# Altium PCB GPS.PcbDoc
Units mil, origin at the board's own origin, x right, y up, seen from the top; angles counter-clockwise.
Board outline 1900 x 1265 mil, 4 copper layers (Top Layer, Layer 1, Layer 2, Bottom Layer), stack 61.758 mil thick; 22 components, 22 nets, 76 pads, 301 vias.
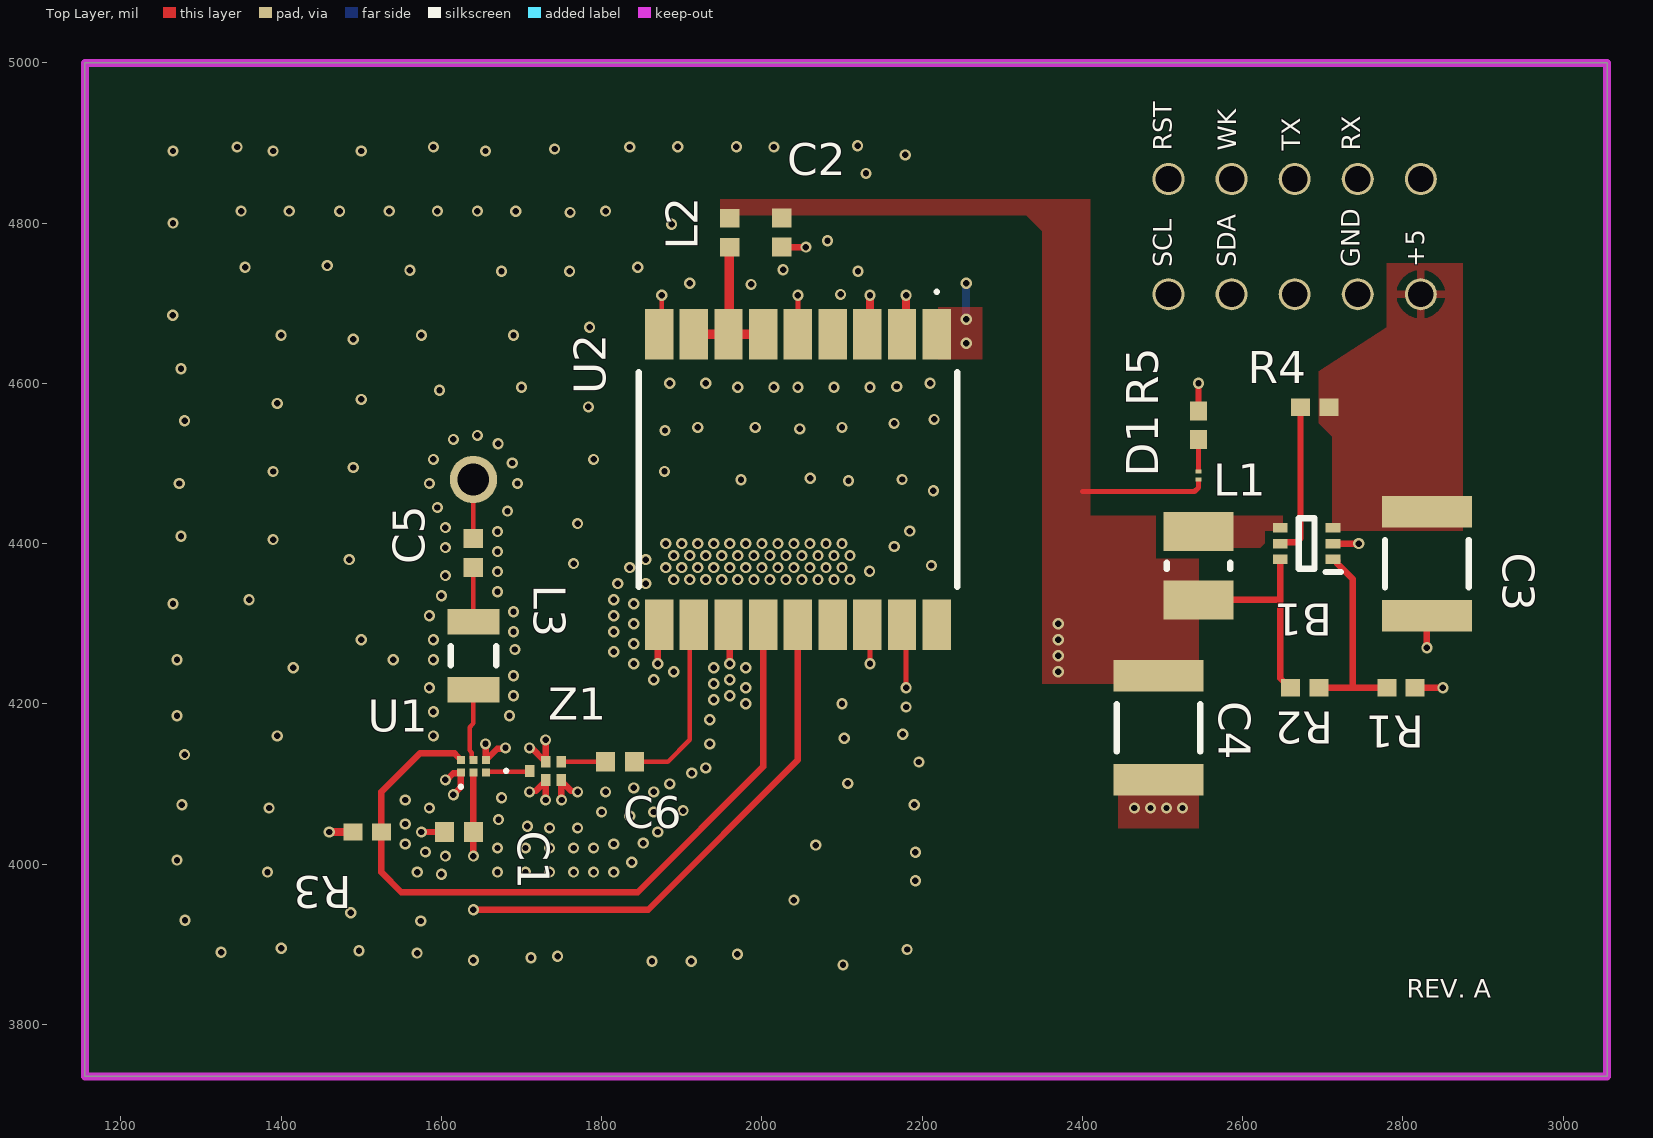
[diagram p0: Top Layer view]
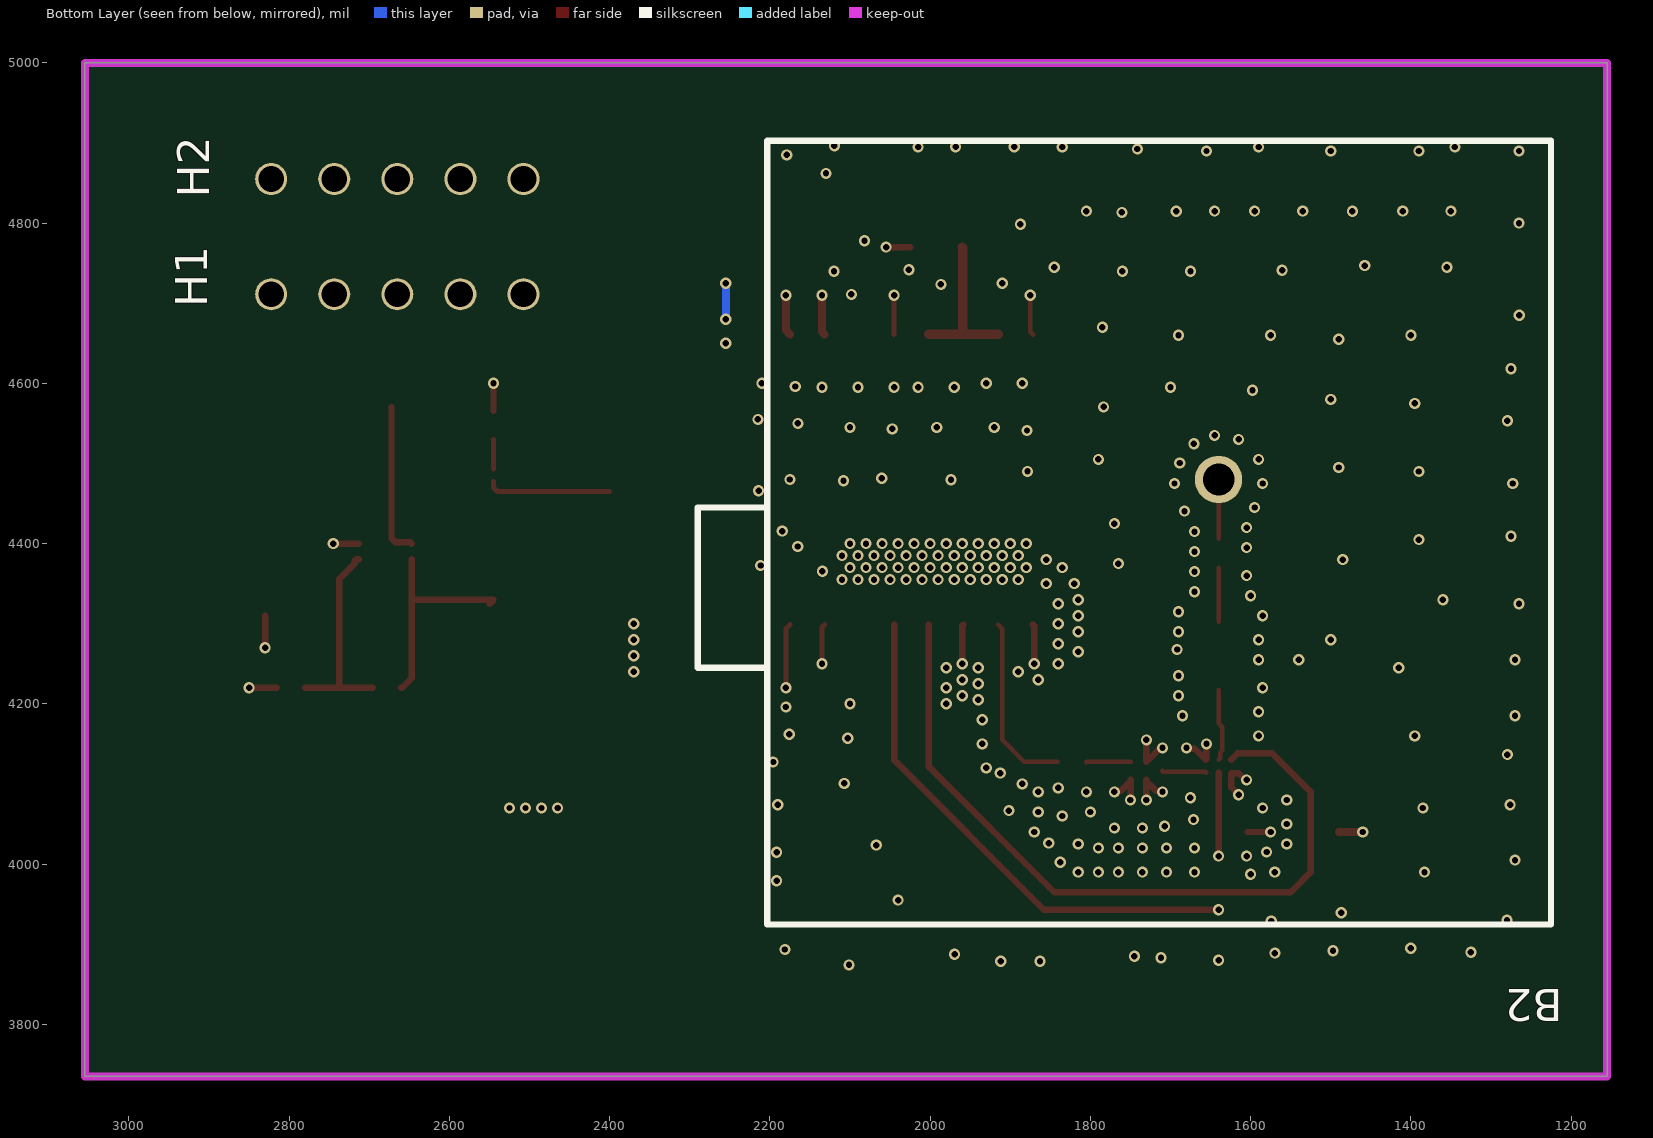
[diagram p1: Bottom Layer view, seen from below]
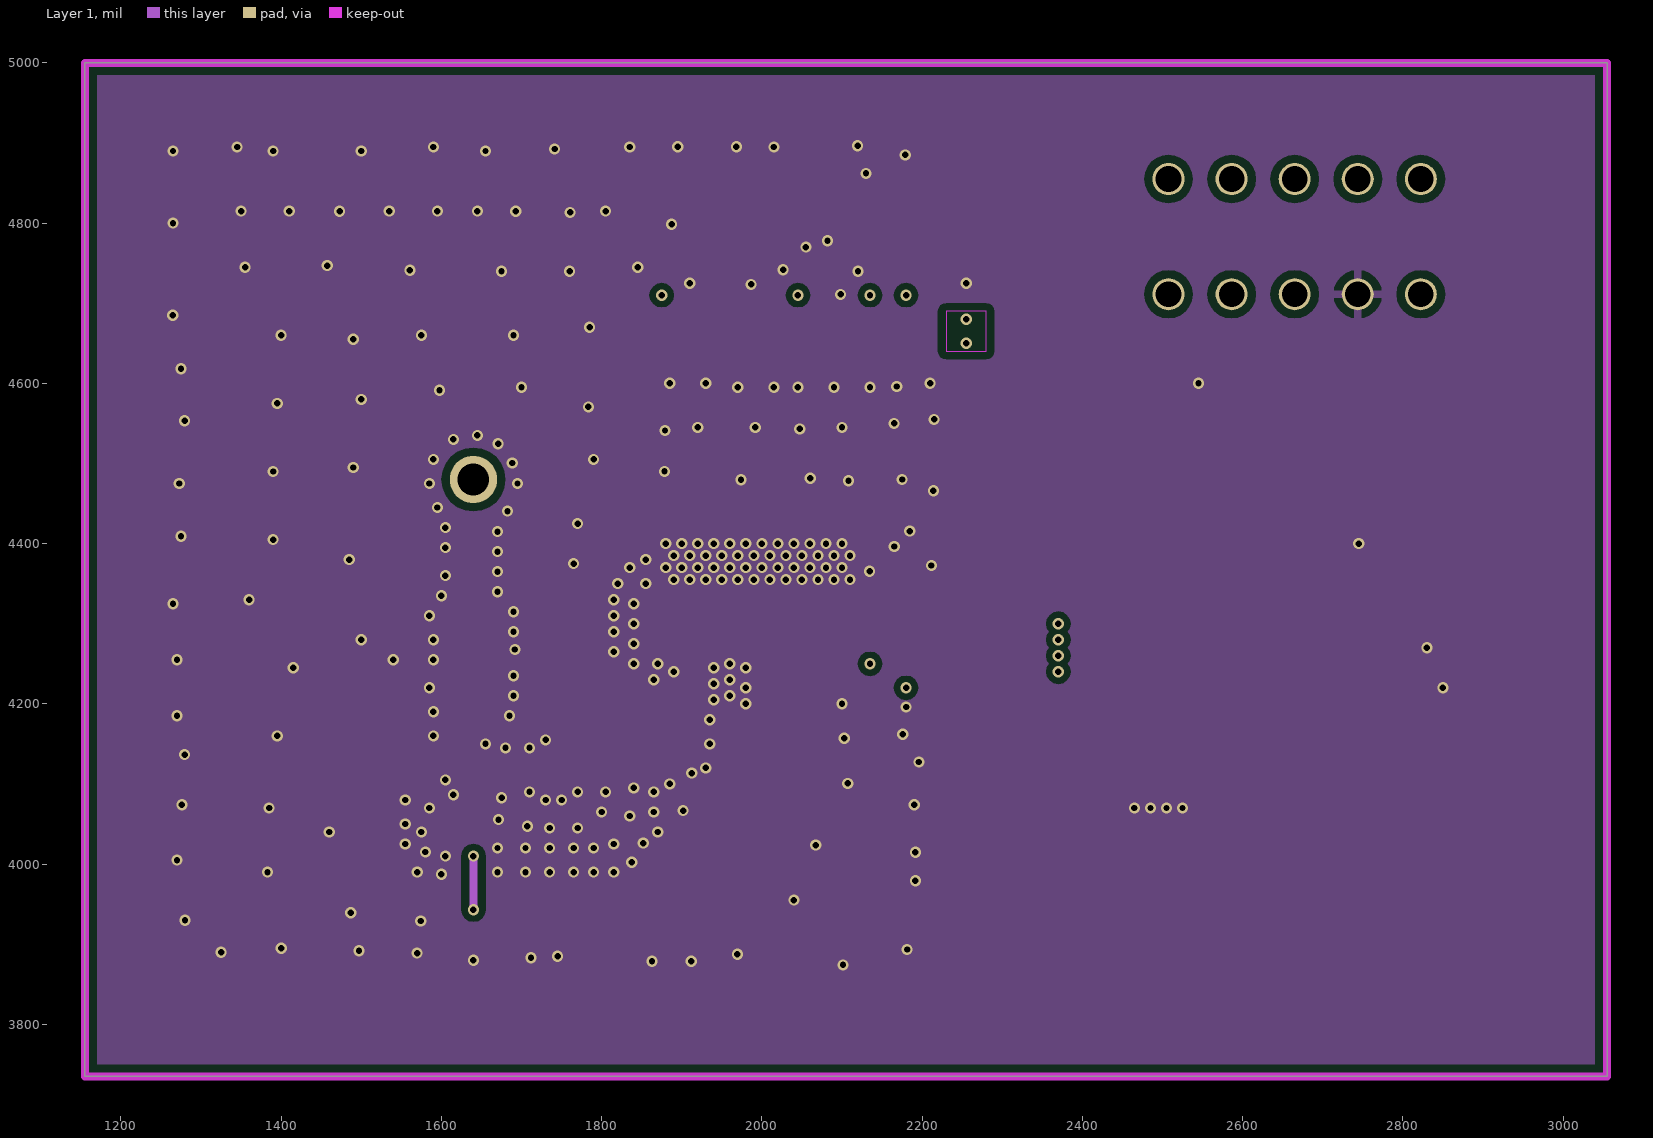
[diagram p2: Layer 1]
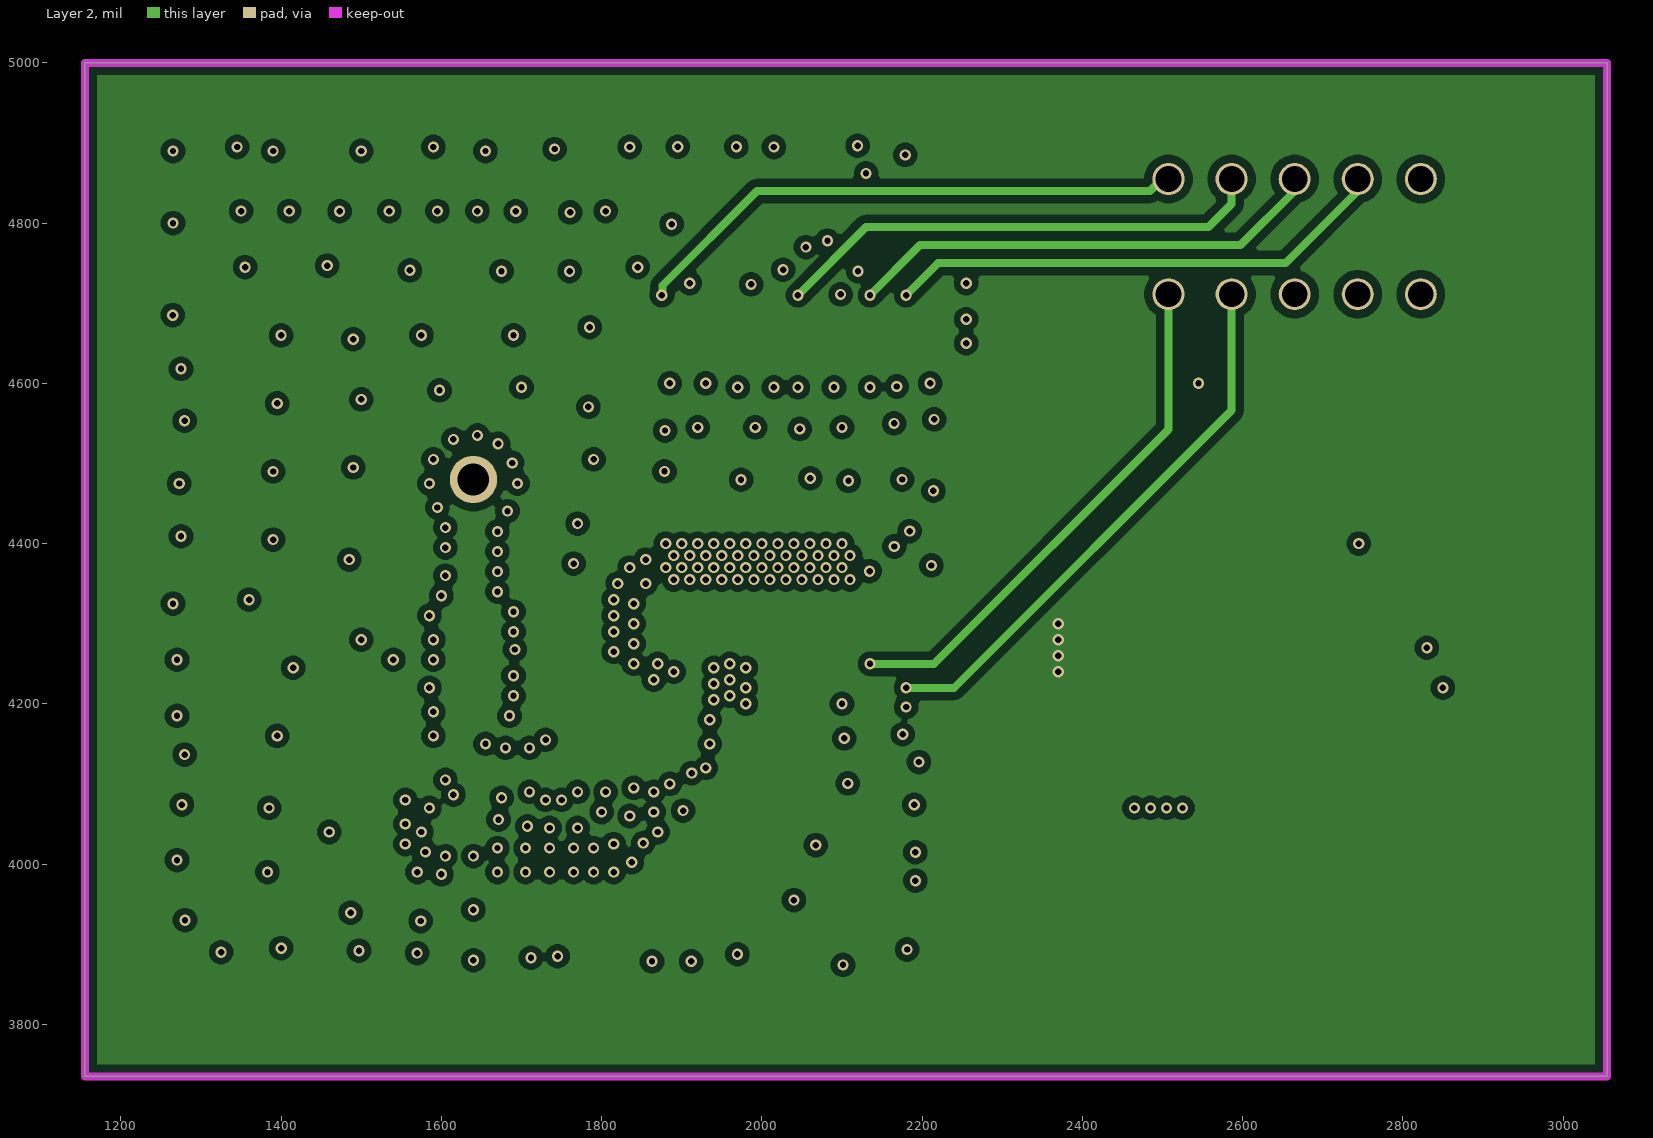
[diagram p3: Layer 2]
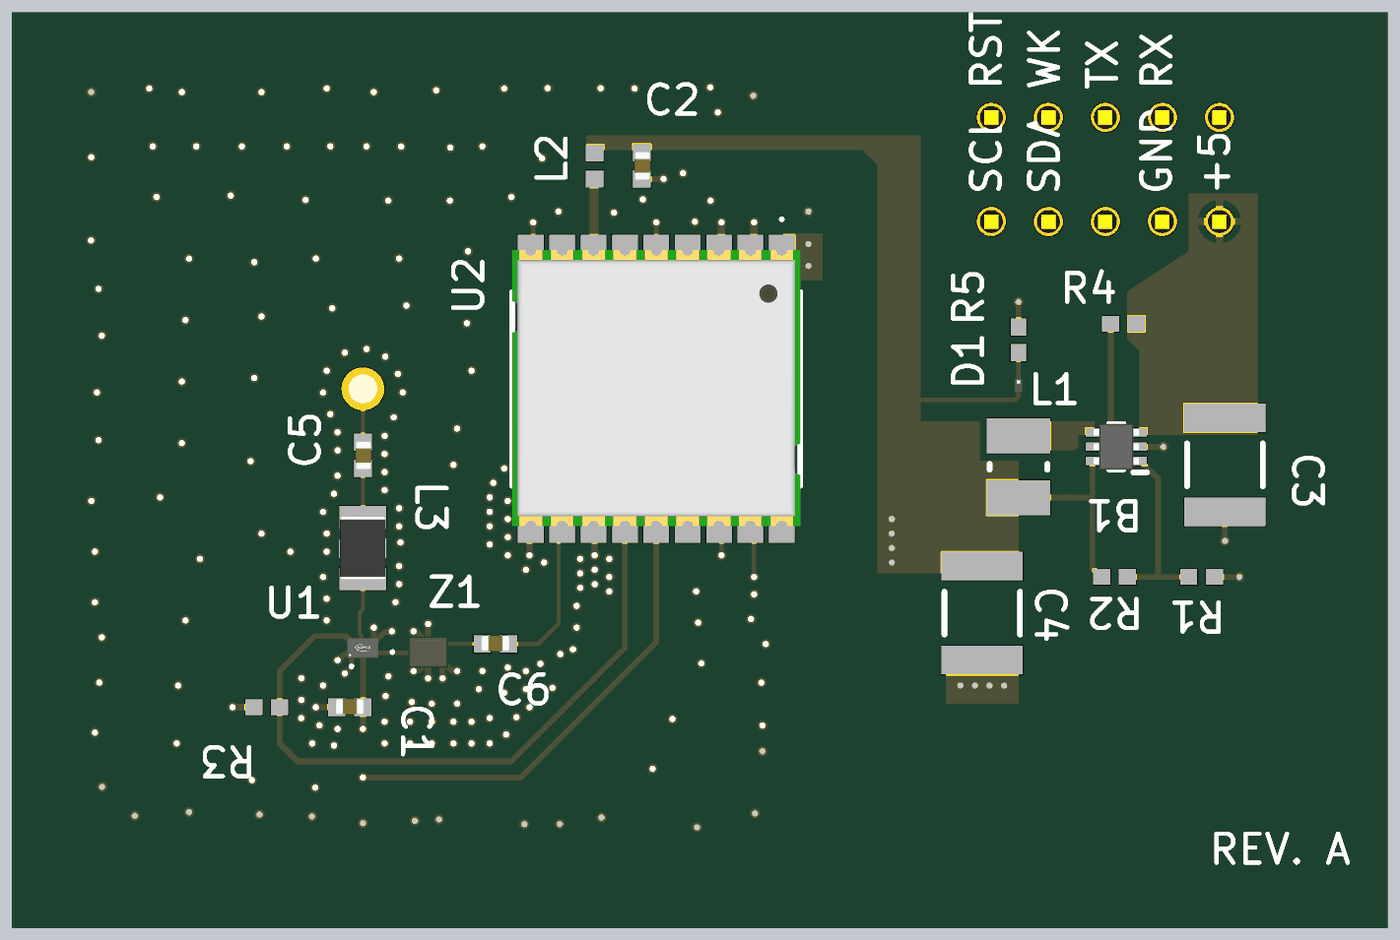
[diagram p4: 3D render of the assembled board from above, using the file's embedded part models]

## Layer stack, top to bottom
Top Solder: solder mask 0.4, Solder Resist, Dk 3.5
Top Layer: signal copper 1.38
Dielectric 2: prepreg 3.91, PP-017, Dk 4.3
Layer 1: signal copper 0.689
Dielectric 1: core 49.8, FR-4, Dk 4.8
Layer 2: signal copper 0.689
Dielectric 3: prepreg 3.91, PP-017, Dk 4.3
Bottom Layer: signal copper 1.38
Bottom Solder: solder mask 0.4, Solder Resist, Dk 3.5

## Board outline
1155,3735 1155,5000 3055,5000 3055,3735

## Design rules (kind name [scope] priority, off if disabled: settings)
Clearance [All] p1: gap=10 ignorepadtopadclearanceinfootprint=TRUE except(4: Arc-Arc Arc-Track Track-Track; 5.9: SMDPad-SMDPad; 6: Arc-SMDPad Track-SMDPad; 8: Arc-Hole Track-Hole Via-Fill Via-Poly Via-Region; 18: THPad-THPad)
HoleToHoleClearance [All] p1: gap=8 allowstackedmicrovias=TRUE
MinimumSolderMaskSliver [All] p1: minsoldermaskwidth=4
PolygonConnect [All] p1: connectstyle=Direct reliefconductorwidth=10 reliefentries=4 polygonreliefangle="90 Angle" airgapwidth=10
RoutingVias [All] p1: holewidth=8 width=14 viastyle="Through Hole" minholewidth=8 minwidth=14 maxholewidth=8 maxwidth=14
SilkToSolderMaskClearance [IsPad] p1: minsilkscreentomaskgap=5.91 clearancetoexposedcopper=TRUE
SolderMaskExpansion [All] p1: expansion=1.5 istentingtop=FALSE
SupplyNets "Schematic Supply Nets_1" [InNet('GND')] p1: voltage=0.000
SupplyNets "Schematic Supply Nets_3" [InNet('+5')] p2: voltage=0.000
SupplyNets "Schematic Supply Nets_2" [InNet('VCC_RF')] p3: voltage=0.000
SupplyNets "Schematic Supply Nets" [InNet('3V3')] p4: voltage=0.000
Width [All] p1: maxlimit=200 minlimit=4 preferedwidth=10 midlayer1_minwidth=10 midlayer1_maxwidth=10 midlayer2_minwidth=10 midlayer2_maxwidth=10 minimp=50.000000 maximp=50.000000 favimp=50.000000
27 further rules are at their usual default settings.

## Components (designator, comment, footprint, x,y, rotation, side; value= is the part's Value field where it differs from the comment)
B1 "MP2141NGTF-Z" MP2141NGTF-Z 2680,4400 r180 top
B2 "ANT2525B00DT1516S" ANT2525B00DT1516S 1640,4480 r0 bottom
C1 "1nF" CAP_1005M(0402) 1621.89,4040 r180 top
C2 "10nF" CAP_1005M(0402) 2025,4788.11 r90 top
C3 "22uF" CAP_3225M(1210) 2830,4374.96 r270 top
C4 "22uF" CAP_3225M(1210) 2495,4170.04 r270 top
C5 "120pF" CAP_1005M(0402) 1640,4388.11 r90 top
C6 "120pF" CAP_1005M(0402) 1822.82,4127.46 r180 top
D1 "Green" APG015CGKKC-TT 2545,4490 r270 top
H1 "1x5 Header Pin" M22-2510505 2507.52,4711.2 r0 bottom
H2 "1x5 Header Pin" M22-2510505 2507.52,4855 r0 bottom
L1 "1uH" IND_1008(2520m) 2545,4372.28 r270 top
L2 "27nH" IND_0402(1005m) 1960,4787.91 r90 top
L3 "5.6 nH" IND_(0805) 1640,4260 r270 top
R1 "44.2k" RES_YAG_0402 2797.72,4220 r180 top
R2 "200k" RES_YAG_0402 2677.72,4220 r180 top
R3 "10k" RES_YAG_0402 1507.28,4040 r180 top
R4 "100k" RES_YAG_0402 2690,4570 r180 top
R5 "120" RES_YAG_0402 2545,4547.72 r270 top
U1 "BGA725L6" BGA725L6E6327FTSA1 1640,4114.25 r90 top
U2 "TESEO-LIV3R" TESEOLIV3R 2045,4480 r0 top
Z1 "B4327" B39162B4327P810 1730,4116.3 r0 top

## Footprints (in the part's own frame and the unit in brackets; to place one, negate y for a bottom-side part, rotate by r counter-clockwise, add the part's x,y. Pads: shape width x height; smd on the part's side, far side on the other; paste and mask are expansions set on the pad)
ANT2525B00DT1516S [mm] "Antennas 20MHz 1575-1606MHz GPS & GLONASS Ceramic PAtch Antenna"
  round 1.5 hole 1: 1(0,0)
  silkscreen extent -10.54,-10.74 16.51,14.11, body extent -10.52,-10.77 16.38,14.08, height 4.84
APG015CGKKC-TT [mm] "Single Color LEDs 0.45X0.25MM GRN SMD LED"
  rect 0.13x0.2 smd mask+0: 1(0,0) 2(0.257,0)
  body extent -0.1,-0.13 0.35,0.12, height 0.21
B39162B4327P810 [mm]
  rect 0.3x0.375 smd: 1(-0.5,0) 2(0,-0.287) 3(0.5,-0.287) 4(0.5,0.287) 5(0,0.287)
  silkscreen extent -1.3,-0.05 -1.2,0.05, body extent -0.7,-0.55 0.7,0.55, height 0.4
BGA725L6E6327FTSA1 [mm]
  rect 0.25x0.25 smd mask+0: 1(0,0.4) 2(0,0) 3(0,-0.4) 4(0.4,-0.4) 5(0.4,0) 6(0.4,0.4)
  silkscreen extent -0.5,0.35 -0.4,0.45, body extent -0.15,-0.55 0.55,0.55, height 0.4
CAP_1005M(0402) [mm] "Chip Capacitor, 2-Leads, Body 1.00x0.50mm, IPC Medium Density"
  rect 0.6x0.62 smd: 1(-0.46,0) 2(0.46,0)
  body extent -0.5,-0.3 0.5,0.25, height 0.48
CAP_3225M(1210) [mm] "Ceramic Chip Capacitor, 2-LEads, Body 3.2x25x2.5mm, IPC Medium Density"
  rect 1x2.85 smd: 1(-1.65,0) 2(1.65,0)
  silkscreen extent -0.75,-1.32 0.75,1.33, body extent -1.78,-1.42 1.78,1.43, height 2.85
IND_0402(1005m) [mm] "0.25x0.25x0.5mm chip inductor"
  rect 0.59x0.62 smd: 1(-0.455,0) 2(0.455,0)
  body extent -0.53,-0.28 0.53,0.27, height 0.55
IND_1008(2520m) [mm] "Shielded"
  rect 1.23x2.22 smd: 1(-1.085,0) 2(1.085,0)
  silkscreen extent -0.1,-1.01 0.1,1.01, body extent -1.35,-1.1 1.35,1.1, height 1.2
IND_(0805) [mm] "Chip Inductor, 2-Leads, Body 2.11x1.50mm, IPC Medium Density"
  rect 0.8x1.64 smd: 1(-1.075,0) 2(1.075,0)
  silkscreen extent -0.3,-0.72 0.3,0.72, body extent -1.1,-0.8 1.1,0.8, height 1.04
M22-2510505 [mil] "Headers & Wire Housings 5 PIN SIL VERTICAL GOLD PIN HEADER, 3.5mm, 2.0mm pitch"
  round 40 hole 32: 1(0,0) 2(78.74,0) 3(157.48,0) 4(236.22,0) 5(314.96,0)
  body extent -39,-39 354,39, height 197
MP2141NGTF-Z [mm]
  rect 0.475x0.3 smd: 1(-0.838,0.5) 2(-0.838,0) 3(-0.838,-0.5) 4(0.838,-0.5) 5(0.838,0) 6(0.838,0.5)
  silkscreen extent -1.07,-0.8 0.25,0.9, body extent -0.8,-0.8 0.8,0.8, height 0.6
RES_YAG_0402 [mm] "Yageo RT0402, 1.00x0.5x0.3"
  rect 0.6x0.55 smd: 1(-0.45,0) 2(0.45,0)
  body extent -0.55,-0.27 0.55,0.28, height 0.35
TESEOLIV3R [mm]
  rect 0.9x1.6 smd: 1(4.4,4.6) 2(3.3,4.6) 3(2.2,4.6) 4(1.1,4.6) 5(0,4.6) 6(-1.1,4.6) 7(-2.2,4.6) 8(-3.3,4.6) 9(-4.4,4.6) 10(-4.4,-4.6) 11(-3.3,-4.6) 12(-2.2,-4.6) 13(-1.1,-4.6) 14(0,-4.6) 15(1.1,-4.6) 16(2.2,-4.6) 17(3.3,-4.6) 18(4.4,-4.6)
  silkscreen extent -5.05,-3.4 5.05,6, body extent -5.05,-4.83 5.05,4.87, height 2.3

## Part data
B1: "IC REG 1A STEP-DOWN SYNCH 2.2MHz", Manufacturer_Name="Monolithic Power Systems (MPS)", Mouser Part Number=946-MP2141NGTF-Z, Datasheet Link=https://componentsearchengine.com/Datasheets/1/MP2141NGTF-Z.pdf, Geometry.Height=0.6mm, Manufacturer_Part_Number=MP2141NGTF-Z, Mouser Price/Stock=https://www.mouser.com/Search/Refine.aspx?Keyword=946-MP2141NGTF-Z, Supplier 1=Mouser, Supplier Part Number 1=946-MP2141NGTF-Z
B2: "Antennas 20MHz 1575-1606MHz GPS & GLONASS", Manufacturer_Name=PULSE, Mouser Part Number=603-ANT225B00DT1516S, Datasheet Link=https://productfinder.pulseelectronics.com/api/open/part-attachments/datasheet/ANT2525B00DT1516S, Geometry.Height=4.1mm, Manufacturer_Part_Number=ANT2525B00DT1516S, Mouser Price/Stock=https://www.mouser.co.uk/ProductDetail/Pulse-Electronics/ANT2525B00DT1516S?qs=oypCK0zG3250CICQYDti8w%3D%3D, Supplier 1=Mouser, Supplier Part Number 1=603-ANT225B00DT1516S
C1: library part GCM155R71H102KA37, "Chip Capacitor, 1nF +/-10%, 50V, 0402, Thickness 0.5 mm", Capacitor Type=Ceramic, Case/Package=0402, Max Operating Temperature=125°C, Min Operating Temperature=-55°C, Supplier Part Number 1=81-GCM155R71H102KA7J, Tolerance=+/-10%, Voltage Rating=50, Mounting Technology=SM, Pins=2, RoHS Compliant=Yes, Supplier 1=Mouser
C2: library part GCM155R71H103KA55D, "Chip Capacitor, 10nF +/-10%, 50V, 0402, Thickness 0.5 mm", Capacitor Type=Ceramic, Case/Package=0402, Max Operating Temperature=125°C, Min Operating Temperature=-55°C, Supplier Part Number 1=81-GCM155R71H103KA5D, Tolerance=+/-10%, Voltage Rating=50, Mounting Technology=SM, Pins=2, RoHS Compliant=Yes, Supplier 1=Mouser
C3 C4: library part GCM32EC71E226KE36K, "Chip Capacitor, 22uF +/-10%, 25V, 3225, Thickness 2.5 mm", Capacitor Type=Ceramic, Case/Package=3225, Max Operating Temperature=125°C, Min Operating Temperature=-55°C, Supplier Part Number 1=81-GCM32EC71E226KE6K, Tolerance=+/-10%, Voltage Rating=25, Mounting Technology=SM, Pins=2, RoHS Compliant=Yes, Supplier 1=Mouser
C5 C6: library part GCM1555C1H121JA16, "Chip Capacitor, 120pF +/-5%, 50V, 0402, Thickness 0.5 mm", Capacitor Type=Ceramic, Case/Package=0402, Max Operating Temperature=125°C, Min Operating Temperature=-55°C, Supplier Part Number 1=81-GCM1555C1H121JA6D, Tolerance=+/-5%, Voltage Rating=50, Mounting Technology=SM, Pins=2, RoHS Compliant=Yes, Supplier 1=Mouser
D1: library part APG015CGKKC-TT, "Green LED", Supplier Part Number 1=604-APG015CGKKC-TT, Supplier 1=Mouser
H1 H2: library part M22-2510505, "1x5, 3.5mm, 2 mm pitch", Supplier Part Number 1=855-M22-2510505, Supplier 1=Mouser
L1: library part 1239AS-H-1R0M=P2, "1uH, 20%, 1008(2520m), Inductor Shielded", Part Number=L08055R6CEWTR, Supplier Part Number 1=81-1239AS-H-1R0MP2, Tolerance="0.2 nH", Supplier 1=Mouser
L2: library part LQG15HS27NJ02D, "27nH, 5%, 0402(1005m), Inductor Unshielded, 350ma", Part Number=L08055R6CEWTR, Supplier Part Number 1=81-LQG15HS27NJ02D, Tolerance="0.2 nH", Supplier 1=Mouser
L3: library part L08055R6CESTR, "5.6(+/- 0.2) nH 0402 Inductor Unshielded", Part Number=L08055R6CEWTR, Supplier Part Number 1=581-L08055R6CESTR, Tolerance="0.2 nH", Supplier 1=Mouser
R1: library part RT0402FRE07200KL, "200k, 0402(1005m), 01(03m)h, 1%, 50V, -55-155 C, 1/16W", Supplier Part Number 1=603-RT0402FRE07200KL, Supplier 1=Mouser
R2: library part RT0402FRE0744K2L, "44.2k, 0402(1005m), 01(03m)h, 1%, 50V, -55-155 C, 1/16W", Supplier Part Number 1=603-RT0402FRE07200KL, Supplier 1=Mouser
R3: library part RT0402FRE0710KL, "10k, 0402(1005m), 01(03m)h, 1%, 50V, -55-155 C, 1/16W", Supplier Part Number 1=603-RT0402FRE0710KL, Supplier 1=Mouser
R4: library part RT0402FRE07100KL, "100k, 0402(1005m), 01(03m)h, 1%, 50V, -55-155 C, 1/16W", Supplier Part Number 1=603-RT0402FRE07100KL, Supplier 1=Mouser
R5: library part RT0402FRE07120RL, "120, 0402(1005m), 01(03m)h, 1%, 50V, -55-155 C, 1/16W", Supplier Part Number 1=603-RT0402FRE07120RL, Supplier 1=Mouser
U1: "RF Amplifier RF SILICON MMIC 1.55 GHz to 1.615 GHz 1.5 V to 3.6 V 3.6 mA 20 dB", Supplier Part Number 1=BGA725L6E6327FTSA1, Supplier 1=Avnet, Supplier 2=Mouser, Supplier Part Number 2=726-BGA725L6E6327
U2: "GNSS / GPS Modules Teseo ROM GNSS module", Supplier Part Number 1=511-TESEO-LIV3R, Supplier 1=Mouser
Z1: library part B39162B4327P810, Supplier Part Number 1=871-B39162B4327P810, Supplier 1=Mouser

## Via types
v1: diameter 14, hole 8, Top Layer to Bottom Layer, 301 vias

## Nets (pads, with @x,y where several pads share a name; then routed paths per layer and width w, separated by ;. In a path a pad name is that pad's centre, name@x,y a point inside that pad or via, vN(x,y) a via of type N, cw(c..) or ccw(c..) an arc to the next point about the centre after c; other vN are vias at no path point)
3V3: B1.6 C2.2 C4.1 D1.2 L1.2 L2.2 R2.2 | length 430.4
  Top Layer w6: 2400,4465 2540,4465 2545,4470 2545,4477.76 D1.2@2544.95,4477.81
  Top Layer w8: L1.2@2550,4324.57 L1.2 2545.43,4330 2647.01,4330 ; B1.6 2647.01,4330 ; R2.2 2659.02,4220 2647.01,4232.01 2647.01,4330
  other v1: 2370,4240 2370,4260 2370,4280 2370,4300
+5: B1.3 C3.1 H1.5 R4.1
GND: B1.2 C1.2 C2.1 C3.2 C4.2 H1.4 R1.1 R3.2 R5.1 U1.1 U1.4 U2.1 U2.10 U2.12 Z1.2 Z1.3 Z1.5 | length 635
  Top Layer w8: v1(1575,4040) C1.2 ; v1(1605,4105) 1606.62,4105 1614.95,4113.33 1624.25,4113.33 1624.25,4095.88 v1(1615,4086.62) ; v1(1655,4150) 1655.37,4149.63 1655.37,4130.92 U1.4@1656.67,4130.92 ; U1.4 U1.4@1656.67,4130.92 ; v1(1680,4145) 1678.85,4143.85 1669.6,4143.85 U1.4@1656.67,4130.92 ; v1(1710,4090) 1711.15,4091.15 1717.62,4091.15 Z1.2@1730,4103.52 ; v1(1710,4145) 1711.15,4143.85 1713.75,4143.85 1726.62,4130.98 1728.09,4130.98 Z1.5@1730,4129.07 ; v1(1730,4080) Z1.2@1730,4103.52 ; Z1.2 Z1.2@1730,4103.52 ; Z1.5 Z1.5@1730,4129.07 ; v1(1730,4155) Z1.5@1730,4129.07 ; v1(1750,4080) 1749.84,4080.16 Z1.3@1749.84,4103.37 ; v1(1770,4090) 1768.85,4091.15 1762.06,4091.15 Z1.3@1749.84,4103.37 ; v1(1870,4250) 1870,4297.13 U2.10 ; U2.12 1960,4297.28 v1(1960,4250) ; C2.1 v1(2055,4770) ; R5.1 v1(2545,4600) ; B1.2 v1(2745,4400) ; R1.1 v1(2850,4220) ; v1(2830,4270) C3.2 ; Z1.3@1749.84,4103.37 1749.84,4104.84 Z1.3 1749.68,4103.52 Z1.3@1749.84,4103.37
  Top Layer w10: v1(1460,4040) R3.2
  Bottom Layer w10: v1(2255,4680) v1(2255,4725)
  other v1: 2101.28,3874.12 1862.88,3878.57 1911.74,3878.57 1640,3880 1711.85,3883.01 1745,3885 1969.49,3887.45 1569.7,3888.93 1325,3890 1497.14,3891.89 2181.24,3893.37 1400,3895 1574.14,3928.91 1280,3930 1486.78,3939.28 2040,3955 2191.6,3979.26 1600.05,3987.17 1382.92,3989.99 1570,3990 1670,3990 1705,3990 1735,3990 1765,3990 1790,3990 1815,3990 1837.72,4002.29 1270,4005 1605,4010 1580,4015 2191.6,4014.79 1670,4020 1705,4020 1735,4020 1765,4020 1790,4020 2067.22,4023.68 1555,4025 1815,4025 1851.88,4026.21 1870,4040 1735,4045 1770,4045 1707.41,4047.19 1555,4050 1671.29,4055.49 1835,4060 1800,4065 1865,4065 1901.66,4066.72 1385,4070 1585,4070 2465,4070 2485,4070 2505,4070 2525,4070 1276.12,4074.15 2190.12,4074.02 1555,4080 1675.19,4082.82 1805,4090 1865,4090 1840,4095 1885,4100 2107.2,4100.68 1912.4,4113.57 1930,4120 2196.04,4127.33 1279.53,4136.61 1935,4150 2102.76,4156.94 1395,4160 1590,4160 2175.7,4162 1935,4180 1270,4185 1685,4185 1590,4190 2180,4196 1980,4200 2100,4200 1940,4205 1690,4210 1960,4210 1585,4220 1980,4220 1940,4225 1865,4230 1960,4230 1690,4235 1890,4240 1415,4245 1940,4245 1980,4245 1840,4250 1270,4255 1540,4255 1590,4255 1815,4265 1691.79,4267.8 1840,4275 1500,4280 1590,4280 1690,4290 1815,4290 1840,4300 1585,4310 1815,4310 1690,4315 1265,4325 1840,4325 1360,4330 1815,4330 1600,4335 1670,4340 1820,4350 1855,4350 1890,4355 1910,4355 1930,4355 1950,4355 1970,4355 1990,4355 2010,4355 2030,4355 2050,4355 2070,4355 2090,4355 2110,4355 1605,4360 1670,4365 2134.44,4365.56 1835,4370 1880,4370 1900,4370 1920,4370 1940,4370 1960,4370 1980,4370 2000,4370 2020,4370 2040,4370 2060,4370 2080,4370 2100,4370 2211.55,4372.67 1765,4375 1485,4380 1855,4380 1890,4385 1910,4385 1930,4385 1950,4385 1970,4385 1990,4385 2010,4385 2030,4385 2050,4385 2070,4385 2090,4385 2110,4385 1670,4390 1605,4395 2165.23,4396.34 1880,4400 1900,4400 1920,4400 1940,4400 1960,4400 1980,4400 2000,4400 2020,4400 2040,4400 2060,4400 2080,4400 2100,4400 1390,4405 1274.99,4409.15 1670,4415 2184.44,4415.56 1605,4420 1770,4425 1682.52,4440.58 1595,4445 2214.13,4465.86 1272.72,4475.02 1585,4475 1695,4475 2108.13,4478.29 1974,4479.6 2175,4480 2060.37,4481.57 1390,4490 1878.46,4490.07 1490,4495 1688.37,4500.61 1590,4505 1790,4505 1670.8,4524.53 1615,4530 1645,4535 1879.12,4541.11 2047.28,4543.07 1920,4545 1991.66,4545.04 2100,4545 2165,4550 1279.53,4553.37 2215,4555 1783.55,4570.63 1395,4575 1500,4580 1597.62,4591.29 1700,4595 1970,4595 2015,4595 2045,4595 2090,4595 2135,4595 2168.33,4596.07 1885,4600 1930,4600 2210,4600 1274.99,4618.1 2255,4650 1490,4655 1399.89,4659.9 1575,4660 1690,4660 1785,4670 1264.77,4685.1 2098.27,4710.95 1986.49,4723.54 1910,4725 1675,4740 1760,4740 2120,4740 1560.73,4741.06 2026.46,4741.78 1355,4745 1845,4745 1457.44,4746.97 2081.94,4778.06 1887.28,4798.5 1265,4800 1760.67,4813.37 1350,4815 1410,4815 1472.93,4814.84 1535,4815 1595,4815 1645,4815 1692.8,4814.84 1805,4815 2130,4862 2179.01,4885.11 1265,4890 1390,4890 1500,4890 1655,4890 1741.24,4892.43 1345,4895 1590,4895 1835,4895 1894.97,4895.36 1968.18,4895.36 2015,4895 2119.44,4896.53
GPS_ANT_OFF: R3.1 U1.6 U2.13 | length 952.3
  Top Layer w8: U1.6 1616.66,4137.59 1616.66,4138.34 1573.34,4138.34 1525,4090 R3.1 1525,3990 1550,3965 1845,3965 2001.69,4121.69 U2.13
GPS_RF_IN: C6.1 U2.11 | length 226.5
  Top Layer w5.62: C6.1 1882.46,4127.46 1910,4155 1910,4293.82 U2.11
GPS_SCL: H1.1 U2.16 | length 712.7
  Top Layer w6: U2.16 2135,4295.51 v1(2135,4250)
  Layer 2 w10: v1(2135,4250) 2215,4250 2507.52,4542.52 H1.1
GPS_SDA: H1.2 U2.17 | length 775.6
  Top Layer w6: U2.17 2180,4293.82 v1(2180,4220)
  Layer 2 w10: v1(2180,4220) 2240,4220 2586.26,4566.26 H1.2
GPS_SYSRST: H2.1 U2.9 | length 749.3
  Top Layer w6: U2.9 1875,4664.33 v1(1875,4710)
  Layer 2 w10: v1(1875,4710) 1875.77,4710.77 1875.77,4721.88 1993.89,4840 2484.4,4840 2499.4,4855 H2.1
GPS_UART_RX: H2.3 U2.3 | length 634.1
  Top Layer w10: U2.3 2135,4664.49 v1(2135,4710)
  Layer 2 w10: v1(2135,4710) 2197.51,4772.51 2597.51,4772.51 H2.3@2665,4840
GPS_UART_TX: H2.4 U2.2 | length 668.6
  Top Layer w10: U2.2 2180,4666.18 v1(2180,4710)
  Layer 2 w10: v1(2180,4710) 2220,4750 2653.74,4750 H2.4@2743.74,4840
GPS_WK: H2.2 U2.5 | length 668.5
  Top Layer w6: U2.5 v1(2045,4710)
  Layer 2 w10: v1(2045,4710) 2130,4795 2557.52,4795 2586.26,4823.74 H2.2
NetB1_1: B1.1 R1.2 R2.1 | length 257.1
  Top Layer w8: R2.1 2737.72,4220 ; B1.1 2716.44,4380.31 2718.34,4378.41 2718.34,4374.96 2737.72,4355.59 2737.72,4220 ; R1.2 2737.72,4220
NetB1_4: B1.4 L1.1
NetB1_5: B1.5 R4.2 | length 191.4
  Top Layer w8: B1.5 2648.91,4401.91 2667.6,4401.91 2672.28,4406.59 R4.2
NetB2_1: B2.1 C5.2 | length 73.8
  Top Layer w5.62: C5.2 B2.1
NetC5_1: C5.1 L3.1 | length 67.7
  Top Layer w5.62: L3.1 C5.1
NetC6_2: C6.2 Z1.4 | length 55.1
  Top Layer w5.62: Z1.4 C6.2@1804.56,4127.6
  Top Layer w6: C6.2@1804.56,4127.6 C6.2
NetD1_1: D1.1 R5.2 | length 37.3
  Top Layer w6: 2545,4492.79 R5.2
NetL2_1: L2.1 U2.6 U2.7 U2.8 | length 196.2
  Top Layer w12: U2.8 U2.7 ; L2.1 1959.19,4769.19 1959.19,4661.91 U2.7 ; U2.6 U2.7
NetL3_2: L3.2 U1.5 | length 91.7
  Top Layer w5.62: U1.5 1637.98,4132.02 1637.98,4139 1635.19,4141.79 1635.19,4170.86 1640,4175.67 L3.2
NetU1_3: U1.3 Z1.1 | length 55.4
  Top Layer w5.62: U1.3@1656.77,4115.28 Z1.1@1709.29,4115.28
  Top Layer w6: U1.3 U1.3@1656.77,4115.28 ; Z1.1@1709.29,4115.28 Z1.1
VCC_RF: C1.1 U1.2 U2.14 | length 822.6
  Top Layer w8: v1(1640,3943) 1858,3943 2045,4130 U2.14 ; v1(1640,4010) C1.1 U1.2
  Layer 1 w10: v1(1640,3943) v1(1640,4010)
pads on no net: H1.3 H2.5 U2.4 U2.15 U2.18

## Polygon pours and split planes (outlines as drawn)
+5 on Top Layer "+5_L01_P012" (solid, pour order 12): 2695,4550 2711.75,4533.25 2711.75,4415.96 2875,4415.96 2875,4750 2780,4750 2780,4670 2695,4614.81
3V3 on Top Layer "3V3_L01_P006" (solid, pour order 6): 1948.18,4810 2330,4810 2350,4790 2350,4225 2545.43,4225 2545.43,4435 2410,4435 2410,4830 1948.18,4830
GND on Top Layer "GND_L01_P015" (solid, pour order 15): 2220,4695 2275,4695 2275,4630 2220,4630
GND on Top Layer "GND_L01_P013" (solid, pour order 13): 2445,4100 2445,4045 2545,4045 2545,4100
NetB1_4 on Top Layer "NETB1_4_L01_P009" (solid, pour order 9): 2622.32,4395 2505,4395 2505,4435 2650,4435 2650,4422.68
GND on Layer 1 "GND_L02_P000" (solid, remove dead copper, pour order 0): 1155,5000 1155,3735 3055,3735 3055,5000
3V3 on Layer 2 "3V3_L03_P014" (solid, remove dead copper, pour order 14): 1155,5000 1155,3735 3055,3735 3055,5000

## Keep-outs
Layer 1:
  region: 2280,4690 2230,4690 2230,4640 2280,4640
Keep-Out Layer:
  the board outline again, w10

## Silkscreen, mask and mechanical layers (free items; w line width, h text height)
Top Overlay:
  text "RST" at 2519.58,4890 h40 r90
  text "WK" at 2600,4890 h40 r90
  text "TX" at 2680,4890 h40 r90
  text "RX" at 2755,4890 h40 r90
  text "SCL" at 2519.58,4745 h40 r90
  text "SDA" at 2599.58,4745 h40 r90
  text "GND" at 2754.58,4745 h40 r90
  text "+5" at 2834.58,4745 h40 r90
  text "REV. A" at 2805,3825 h40